# Altium PCB FP_A.PcbDoc (part 2 of 2)
Units mm, origin at the board's own origin, x right, y up, seen from the top; angles counter-clockwise.
Board outline 100 x 100 mm, 2 copper layers (Top Layer, Bottom Layer); 46 components, 104 nets, 431 pads, 841 vias.
Unrouted connection lines stored in the file: 843.
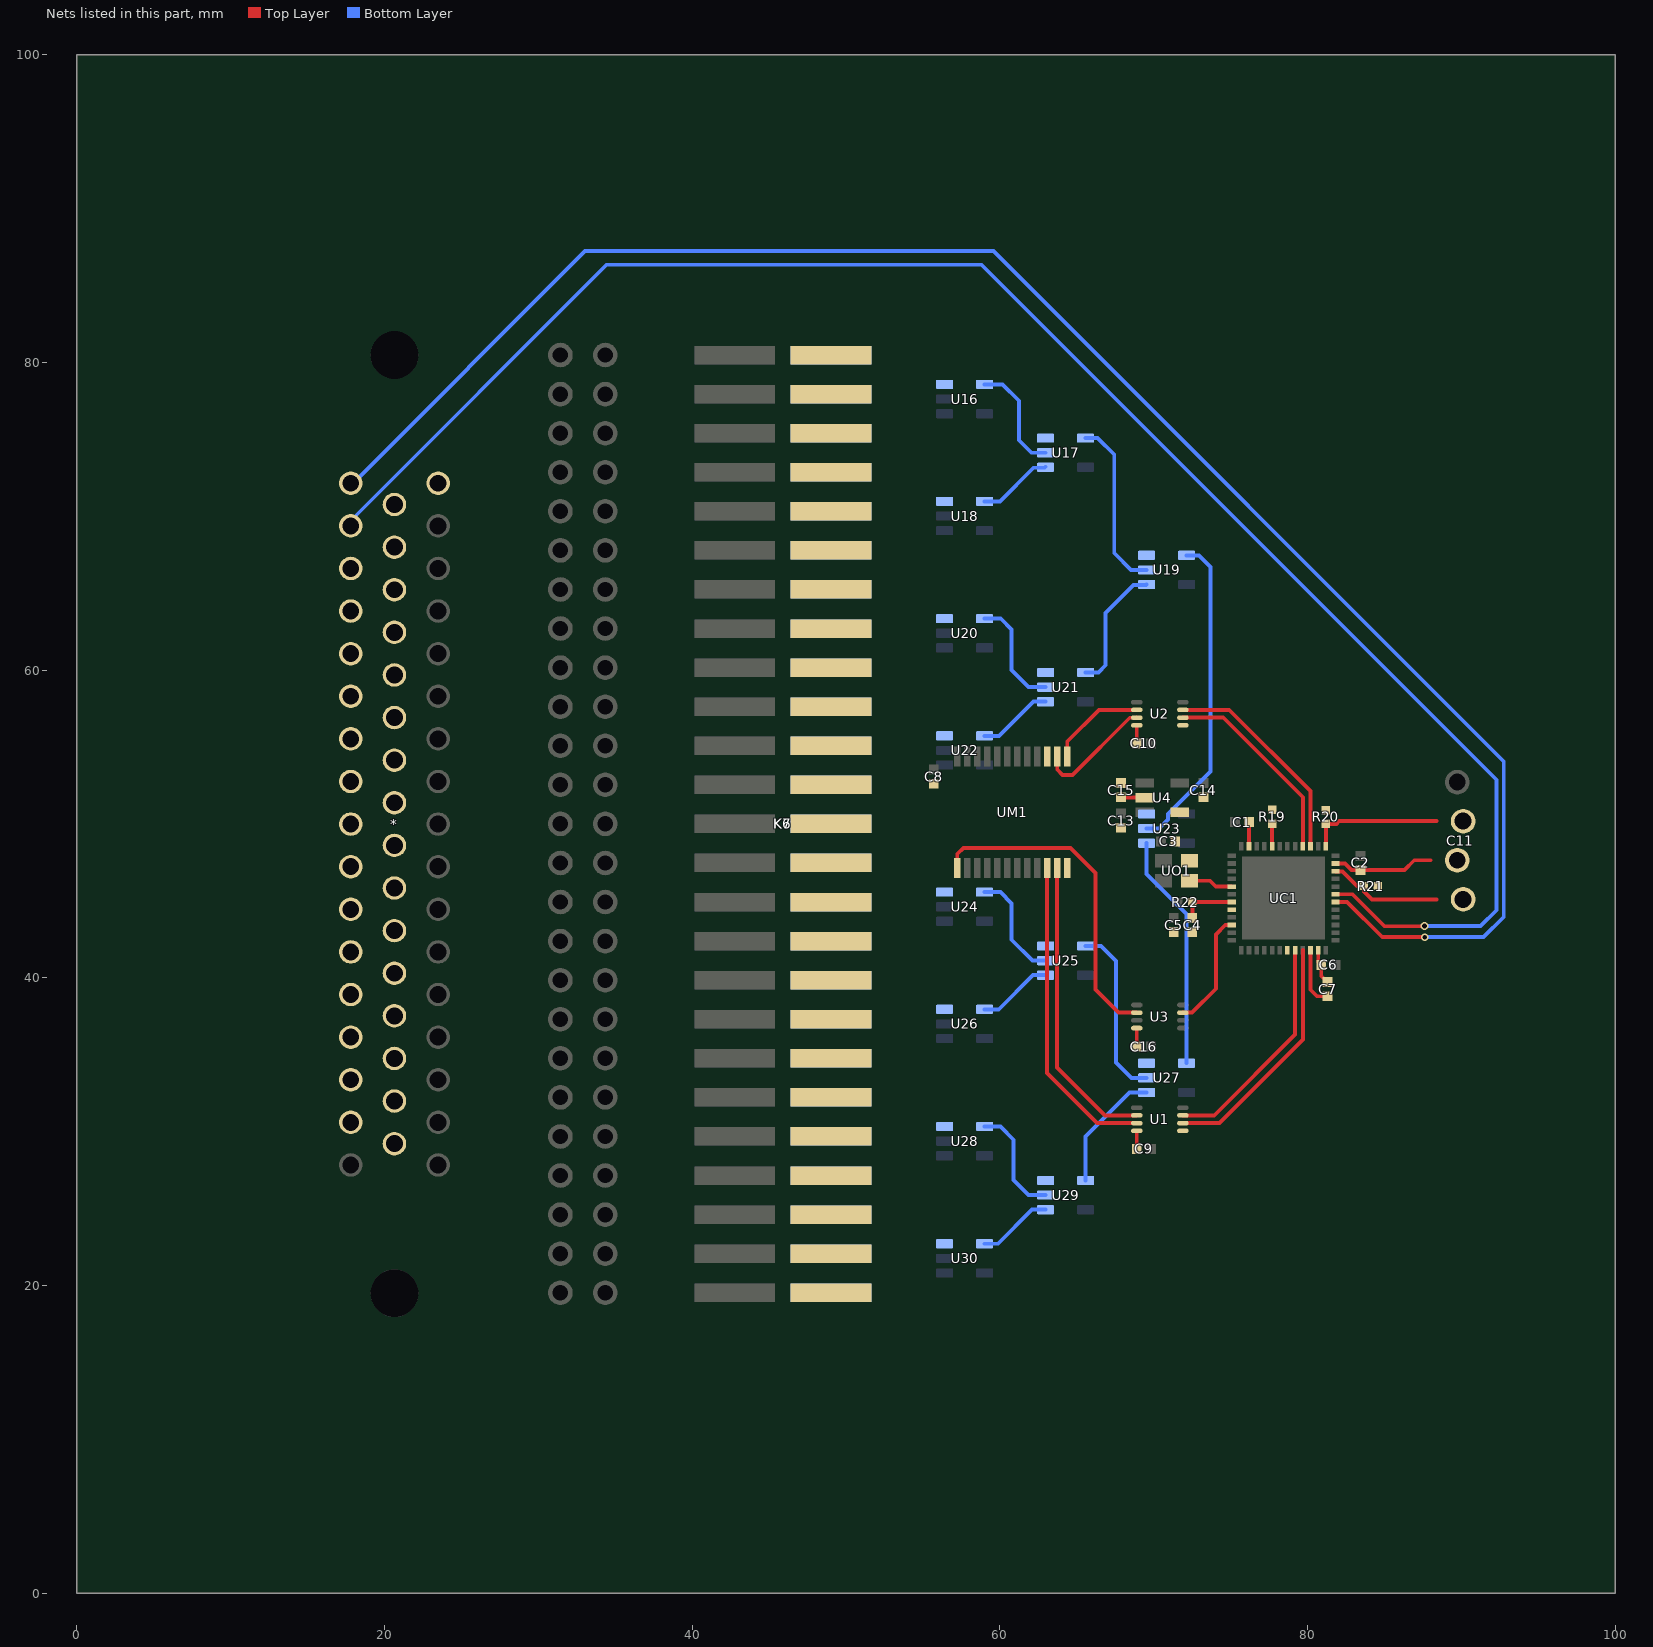
[diagram p2: the nets of this part, all layers, seen from the top]

## Via types
v1: diameter 0.45, hole 0.3, Top Layer to Bottom Layer, tented both sides, 823 vias
v2: diameter 0.5, hole 0.3, Top Layer to Bottom Layer, 18 vias

## Nets (pads, with @x,y where several pads share a name; then routed paths per layer and width w, separated by ;. In a path a pad name is that pad's centre, name@x,y a point inside that pad or via, vN(x,y) a via of type N, cw(c..) or ccw(c..) an arc to the next point about the centre after c; other vN are vias at no path point) (continued)
GND: *.1 *.18 *.19 *.20 *.21 *.22 *.23 *.24 *.25 *.26 *.27 *.28 *.29 *.30 *.31 *.32 *.33 *.36 *.37 *.38 *.39 *.40 *.41 *.42 *.43 *.44 *.45 *.46 *.47 *.48 *.49 C1.2 C2.1 C3.1 C4.1 C5.1 C6.2 C7.2 C8.2 C9.1 C10.1 C11.3 C13.2 C14.2 C15.2 C16.1 K6.2 K6.4 K6.6 K6.8 K6.10 K6.12 K6.14 K6.16 K6.18 K6.20 K6.22 K6.24 K6.26 K6.28 K6.30 K6.32 K6.34 K6.36 K6.38 K6.40 K6.42 K6.44 K6.46 K6.48 K6.50 K7.2 K7.4 K7.6 K7.8 K7.10 K7.12 K7.14 K7.16 K7.18 K7.20 K7.22 K7.24 K7.26 K7.28 K7.30 K7.32 K7.34 K7.36 K7.38 K7.40 K7.42 K7.44 K7.46 K7.48 K7.50 R19.2 R20.2 R21.2 U1.4 U1.5 U2.4 U2.5 U3.4 U4.4 U16.3 U17.3 U18.3 U19.3 U20.3 U21.3 U22.3 U23.3 U24.3 U25.3 U26.3 U27.3 U28.3 U29.3 U30.3 UC1.8 UC1.23 UC1.35 UC1.47 UM1.12 UM1.15 UO1.2 | length 14.2
  Top Layer w0.254: K7.26@49.022,50.013 K7.26@49.093,49.941 ; C9.1@68.904,28.884 U1.4@68.904,30.06 ; C16.1@68.904,35.535 U3.4@68.904,36.74 ; C10.1@68.904,55.241 U2.4@68.904,56.421 ; UC1.47@76.198,48.562 C1.2@76.198,50.133 ; UC1.23@80.698,41.812 80.698,41.041 C6.2@80.896,40.843 80.896,40.138 C7.2@81.305,39.728 ; UC1.35@81.823,47.437 82.434,47.437 82.858,47.013 C2.1@83.439,47.013 86.306,47.013 86.944,47.65 88.011,47.65
  other v1: -78.067,-159.574 -75.527,-159.574 -72.987,-159.574 -67.907,-159.574 -65.367,-159.574 -62.827,-159.574 -60.287,-159.574 -57.747,-159.574 -55.207,-159.574 -52.667,-159.574 -47.587,-159.574 -45.047,-159.574 -42.507,-159.574 -39.967,-159.574 -37.427,-159.574 -34.887,-159.574 -32.347,-159.574 -27.267,-159.574 -24.727,-159.574 -22.187,-159.574 -19.647,-159.574 -17.107,-159.574 -14.567,-159.574 -12.027,-159.574 -6.947,-159.574 -4.407,-159.574 -1.867,-159.574 -76.797,-157.034 -74.257,-157.034 -71.717,-157.034 -66.637,-157.034 -64.097,-157.034 -61.557,-157.034 -59.017,-157.034 -56.477,-157.034 -53.937,-157.034 -51.397,-157.034 -46.317,-157.034 -43.777,-157.034 -41.237,-157.034 -38.697,-157.034 -36.157,-157.034 -33.617,-157.034 -31.077,-157.034 -25.997,-157.034 -23.457,-157.034 -20.917,-157.034 -18.377,-157.034 -15.837,-157.034 -13.297,-157.034 -10.757,-157.034 -5.677,-157.034 -3.137,-157.034 -0.597,-157.034 -78.067,-154.494 -75.527,-154.494 -72.987,-154.494 -70.447,-154.494 -67.907,-154.494 -65.367,-154.494 -62.827,-154.494 -60.287,-154.494 -57.747,-154.494 -55.207,-154.494 -52.667,-154.494 -50.127,-154.494 -47.587,-154.494 -45.047,-154.494 -42.507,-154.494 -39.967,-154.494 -37.427,-154.494 -34.887,-154.494 -32.347,-154.494 -29.807,-154.494 -27.267,-154.494 -24.727,-154.494 -22.187,-154.494 -19.647,-154.494 -17.107,-154.494 -14.567,-154.494 -12.027,-154.494 -9.487,-154.494 -6.947,-154.494 -4.407,-154.494 -1.867,-154.494 -76.797,-151.954 -74.257,-151.954 -71.717,-151.954 -69.177,-151.954 -66.637,-151.954 -64.097,-151.954 -61.557,-151.954 -46.317,-151.954 -31.077,-151.954 -28.537,-151.954 -18.377,-151.954 -15.837,-151.954 -13.297,-151.954 -10.757,-151.954 -8.217,-151.954 -5.677,-151.954 -3.137,-151.954 -0.597,-151.954 -78.067,-149.414 -75.527,-149.414 -72.987,-149.414 -70.447,-149.414 -67.907,-149.414 -65.367,-149.414 -62.827,-149.414 -60.287,-149.414 -50.127,-149.414 -42.507,-149.414 -29.807,-149.414 -27.267,-149.414 -24.727,-149.414 -22.187,-149.414 -19.647,-149.414 -17.107,-149.414 -14.567,-149.414 -12.027,-149.414 -9.487,-149.414 -6.947,-149.414 -4.407,-149.414 -1.867,-149.414 -76.797,-146.874 -74.257,-146.874 -71.717,-146.874 -69.177,-146.874 -66.637,-146.874 -64.097,-146.874 -61.557,-146.874 -59.017,-146.874 -56.477,-146.874 -53.937,-146.874 -51.397,-146.874 -48.857,-146.874 -46.317,-146.874 -43.777,-146.874 -41.237,-146.874 -38.697,-146.874 -36.157,-146.874 -33.617,-146.874 -31.077,-146.874 -28.537,-146.874 -25.997,-146.874 -23.457,-146.874 -20.917,-146.874 -18.377,-146.874 -15.837,-146.874 -13.297,-146.874 -10.757,-146.874 -8.217,-146.874 -5.677,-146.874 -3.137,-146.874 -0.597,-146.874 -78.067,-144.334 -75.527,-144.334 -72.987,-144.334 -70.447,-144.334 -67.907,-144.334 -65.367,-144.334 -62.827,-144.334 -60.287,-144.334 -57.747,-144.334 -55.207,-144.334 -52.667,-144.334 -24.727,-144.334 -22.187,-144.334 -19.647,-144.334 -17.107,-144.334 -14.567,-144.334 -12.027,-144.334 -9.487,-144.334 -6.947,-144.334 -4.407,-144.334 -1.867,-144.334 -76.797,-141.794 -74.257,-141.794 -71.717,-141.794 -69.177,-141.794 -66.637,-141.794 -64.097,-141.794 -61.557,-141.794 -59.017,-141.794 -56.477,-141.794 -53.937,-141.794 -25.997,-141.794 -23.457,-141.794 -20.917,-141.794 -18.377,-141.794 -15.837,-141.794 -13.297,-141.794 -10.757,-141.794 -8.217,-141.794 -5.677,-141.794 -3.137,-141.794 -0.597,-141.794 -78.067,-139.254 -75.527,-139.254 -72.987,-139.254 -70.447,-139.254 -67.907,-139.254 -65.367,-139.254 -62.827,-139.254 -60.287,-139.254 -57.747,-139.254 -55.207,-139.254 -52.667,-139.254 -50.127,-139.254 -47.587,-139.254 -45.047,-139.254 -42.507,-139.254 -39.967,-139.254 -37.427,-139.254 -34.887,-139.254 -32.347,-139.254 -29.807,-139.254 -27.267,-139.254 -24.727,-139.254 -22.187,-139.254 -19.647,-139.254 -17.107,-139.254 -14.567,-139.254 -12.027,-139.254 -9.487,-139.254 -6.947,-139.254 -4.407,-139.254 -1.867,-139.254 -76.797,-136.714 -74.257,-136.714 -71.717,-136.714 -69.177,-136.714 -46.317,-136.714 -43.777,-136.714 -36.157,-136.714 -33.617,-136.714 -10.757,-136.714 -8.217,-136.714 -5.677,-136.714 -3.137,-136.714 -0.597,-136.714 -78.067,-134.174 -75.527,-134.174 -72.987,-134.174 -70.447,-134.174 -50.127,-134.174 -47.587,-134.174 -45.047,-134.174 -42.507,-134.174 -39.967,-134.174 -37.427,-134.174 -34.887,-134.174 -32.347,-134.174 -29.807,-134.174 -12.027,-134.174 -9.487,-134.174 -6.947,-134.174 -4.407,-134.174 -1.867,-134.174 -76.797,-131.634 -74.257,-131.634 -71.717,-131.634 -48.857,-131.634 -46.317,-131.634 -43.777,-131.634 -41.237,-131.634 -38.697,-131.634 -33.617,-131.634 -3.137,-131.634 -0.597,-131.634 -46.482,-129.221 -78.067,-129.094 -75.527,-129.094 -72.987,-129.094 -39.967,-129.094 -34.887,-129.094 -32.347,-129.094 -4.407,-129.094 -1.867,-129.094 -76.797,-126.554 -74.257,-126.554 -71.717,-126.554 -31.077,-126.554 -8.217,-126.554 -3.137,-126.554 -0.597,-126.554 -68.326,-126.427 -46.609,-126.173 -78.067,-124.014 -75.527,-124.014 -47.587,-124.014 -4.407,-124.014 -1.867,-124.014 -30.861,-123.125 -70.104,-121.855 -76.797,-121.474 -74.257,-121.474 -41.237,-121.474 -10.757,-121.474 -8.217,-121.474 -3.137,-121.474 -0.597,-121.474 -78.067,-118.934 -75.527,-118.934 -50.127,-118.934 -47.587,-118.934 -45.047,-118.934 -42.507,-118.934 -37.427,-118.934 -32.347,-118.934 -29.807,-118.934 -12.027,-118.934 -4.407,-118.934 -1.867,-118.934 -76.797,-116.394 -74.257,-116.394 -69.177,-116.394 -41.237,-116.394 -3.137,-116.394 -0.597,-116.394 -48.514,-115.505 -31.877,-115.378 -78.067,-113.854 -75.527,-113.854 -37.427,-113.854 -9.487,-113.854 -4.407,-113.854 -1.867,-113.854 -68.707,-112.076 -76.797,-111.314 -74.257,-111.314 -71.717,-111.314 -48.857,-111.314 -46.317,-111.314 -41.237,-111.314 -33.617,-111.314 -31.077,-111.314 -10.757,-111.314 -3.137,-111.314 -0.597,-111.314 -78.067,-108.774 -75.527,-108.774 -70.447,-108.774 -4.407,-108.774 -1.867,-108.774 -8.128,-108.647 -67.183,-106.615 -11.811,-106.615 -76.797,-106.234 -74.257,-106.234 -48.857,-106.234 -46.317,-106.234 -43.777,-106.234 -33.617,-106.234 -31.077,-106.234 -5.677,-106.234 -3.137,-106.234 -0.597,-106.234 -68.326,-104.456 -78.067,-103.694 -75.527,-103.694 -70.447,-103.694 -34.887,-103.694 -9.487,-103.694 -4.407,-103.694 -1.867,-103.694 -67.183,-101.535 -76.797,-101.154 -74.257,-101.154 -71.717,-101.154 -48.857,-101.154 -46.317,-101.154 -43.777,-101.154 -31.077,-101.154 -8.217,-101.154 -3.137,-101.154 -0.597,-101.154 -78.067,-98.614 -75.527,-98.614 -70.447,-98.614 -9.487,-98.614 -4.407,-98.614 -1.867,-98.614 -48.514,-97.725 -44.958,-97.725 -30.734,-97.598 -76.797,-96.074 -74.257,-96.074 -3.137,-96.074 -0.597,-96.074 -71.755,-94.169 -78.067,-93.534 -75.527,-93.534 -50.127,-93.534 -47.587,-93.534 -29.807,-93.534 -12.027,-93.534 -4.407,-93.534 -1.867,-93.534 -44.323,-92.137 -68.326,-91.375 -76.797,-90.994 -74.257,-90.994 -33.617,-90.994 -31.077,-90.994 -8.217,-90.994 -3.137,-90.994 -0.597,-90.994 -47.752,-90.105 -8.509,-88.835 -78.067,-88.454 -75.527,-88.454 -65.367,-88.454 -45.047,-88.454 -42.507,-88.454 -37.427,-88.454 -4.407,-88.454 -1.867,-88.454 -10.668,-86.803 -76.797,-85.914 -74.257,-85.914 -48.857,-85.914 -31.077,-85.914 -3.137,-85.914 -0.597,-85.914 -78.067,-83.374 -75.527,-83.374 -47.587,-83.374 -45.047,-83.374 -39.967,-83.374 -37.427,-83.374 -34.887,-83.374 -32.347,-83.374 -4.407,-83.374 -1.867,-83.374 -76.797,-80.834 -74.257,-80.834 -69.177,-80.834 -46.317,-80.834 -36.157,-80.834 -31.077,-80.834 -5.677,-80.834 -3.137,-80.834 -0.597,-80.834 -78.067,-78.294 -75.527,-78.294 -72.987,-78.294 -50.127,-78.294 -47.587,-78.294 -45.047,-78.294 -42.507,-78.294 -39.967,-78.294 -34.887,-78.294 -32.347,-78.294 -12.027,-78.294 -9.487,-78.294 -6.947,-78.294 -4.407,-78.294 -1.867,-78.294 -76.797,-75.754 -74.257,-75.754 -71.717,-75.754 -46.317,-75.754 -43.777,-75.754 -33.617,-75.754 -31.077,-75.754 -10.757,-75.754 -8.217,-75.754 -5.677,-75.754 -3.137,-75.754 -0.597,-75.754 -78.067,-73.214 -75.527,-73.214 -72.987,-73.214 -70.447,-73.214 -52.667,-73.214 -50.127,-73.214 -47.587,-73.214 -45.047,-73.214 -42.507,-73.214 -34.887,-73.214 -32.347,-73.214 -29.807,-73.214 -27.267,-73.214 -9.487,-73.214 -6.947,-73.214 -4.407,-73.214 -1.867,-73.214 -76.797,-70.674 -51.397,-70.674 -48.857,-70.674 -31.077,-70.674 -28.537,-70.674 -25.997,-70.674 -3.137,-70.674 -0.597,-70.674 -78.067,-68.134 -75.527,-68.134 -52.667,-68.134 -50.127,-68.134 -47.587,-68.134 -29.807,-68.134 -27.267,-68.134 -1.867,-68.134 -76.797,-65.594 -74.257,-65.594 -71.717,-65.594 -69.177,-65.594 -66.637,-65.594 -64.097,-65.594 -61.557,-65.594 -59.017,-65.594 -56.477,-65.594 -53.937,-65.594 -51.397,-65.594 -48.857,-65.594 -46.317,-65.594 -43.777,-65.594 -41.237,-65.594 -38.697,-65.594 -36.157,-65.594 -33.617,-65.594 -31.077,-65.594 -28.537,-65.594 -25.997,-65.594 -23.457,-65.594 -20.917,-65.594 -18.377,-65.594 -15.837,-65.594 -13.297,-65.594 -10.757,-65.594 -8.217,-65.594 -5.677,-65.594 -3.137,-65.594 -0.597,-65.594 -78.067,-63.054 -75.527,-63.054 -72.987,-63.054 -70.447,-63.054 -67.907,-63.054 -65.367,-63.054 -62.827,-63.054 -60.287,-63.054 -57.747,-63.054 -55.207,-63.054 -52.667,-63.054 -50.127,-63.054 -47.587,-63.054 -45.047,-63.054 -32.347,-63.054 -29.807,-63.054 -27.267,-63.054 -24.727,-63.054 -6.947,-63.054 -4.407,-63.054 -1.867,-63.054 -76.797,-60.514 -74.257,-60.514 -71.717,-60.514 -69.177,-60.514 -56.477,-60.514 -53.937,-60.514 -51.397,-60.514 -48.857,-60.514 -46.317,-60.514 -43.777,-60.514 -41.237,-60.514 -36.157,-60.514 -33.617,-60.514 -31.077,-60.514 -28.537,-60.514 -25.997,-60.514 -23.457,-60.514 -20.917,-60.514 -18.377,-60.514 -15.837,-60.514 -13.297,-60.514 -10.757,-60.514 -8.217,-60.514 -5.677,-60.514 -3.137,-60.514 -0.597,-60.514 -78.067,-57.974 -47.587,-57.974 -45.047,-57.974 -39.967,-57.974 -37.427,-57.974 -34.887,-57.974 -32.347,-57.974 -29.807,-57.974 -27.267,-57.974 -24.727,-57.974 -22.187,-57.974 -14.567,-57.974 -12.027,-57.974 -6.947,-57.974 -4.407,-57.974 -1.867,-57.974 -76.797,-55.434 -74.257,-55.434 -71.717,-55.434 -69.177,-55.434 -66.637,-55.434 -64.097,-55.434 -61.557,-55.434 -59.017,-55.434 -56.477,-55.434 -53.937,-55.434 -51.397,-55.434 -48.857,-55.434 -46.317,-55.434 -38.697,-55.434 -33.617,-55.434 -31.077,-55.434 -28.537,-55.434 -25.997,-55.434 -18.377,-55.434 -13.297,-55.434 -10.757,-55.434 -8.217,-55.434 -5.677,-55.434 -3.137,-55.434 -0.597,-55.434 -78.067,-52.894 -75.527,-52.894 -72.987,-52.894 -70.447,-52.894 -67.907,-52.894 -65.367,-52.894 -62.827,-52.894 -60.287,-52.894 -57.747,-52.894 -55.207,-52.894 -52.667,-52.894 -50.127,-52.894 -47.587,-52.894 -45.047,-52.894 -42.507,-52.894 -39.967,-52.894 -37.427,-52.894 -34.887,-52.894 -32.347,-52.894 -29.807,-52.894 -27.267,-52.894 -24.727,-52.894 -22.187,-52.894 -19.647,-52.894 -17.107,-52.894 -12.027,-52.894 -9.487,-52.894 -6.947,-52.894 -4.407,-52.894 -1.867,-52.894 -76.797,-50.354 -74.257,-50.354 -71.717,-50.354 -69.177,-50.354 -66.637,-50.354 -64.097,-50.354 -61.557,-50.354 -59.017,-50.354 -56.477,-50.354 -53.937,-50.354 -51.397,-50.354 -48.857,-50.354 -46.317,-50.354 -43.777,-50.354 -41.237,-50.354 -38.697,-50.354 -36.157,-50.354 -33.617,-50.354 -31.077,-50.354 -28.537,-50.354 -25.997,-50.354 -23.457,-50.354 -20.917,-50.354 -18.377,-50.354 -15.837,-50.354 -13.297,-50.354 -10.757,-50.354 -8.217,-50.354 -5.677,-50.354 -3.137,-50.354 -0.597,-50.354 -78.067,-47.814 -75.527,-47.814 -72.987,-47.814 -70.447,-47.814 -67.907,-47.814 -65.367,-47.814 -62.827,-47.814 -60.287,-47.814 -57.747,-47.814 -22.187,-47.814 -19.647,-47.814 -17.107,-47.814 -14.567,-47.814 -12.027,-47.814 -9.487,-47.814 -6.947,-47.814 -4.407,-47.814 -1.867,-47.814 -76.797,-45.274 -74.257,-45.274 -71.717,-45.274 -69.177,-45.274 -66.637,-45.274 -64.097,-45.274 -61.557,-45.274 -59.017,-45.274 -20.917,-45.274 -18.377,-45.274 -15.837,-45.274 -13.297,-45.274 -10.757,-45.274 -8.217,-45.274 -5.677,-45.274 -3.137,-45.274 -0.597,-45.274 -78.067,-42.734 -75.527,-42.734 -72.987,-42.734 -70.447,-42.734 -67.907,-42.734 -65.367,-42.734 -62.827,-42.734 -60.287,-42.734 -57.747,-42.734 -22.187,-42.734 -19.647,-42.734 -17.107,-42.734 -14.567,-42.734 -12.027,-42.734 -9.487,-42.734 -6.947,-42.734 -4.407,-42.734 -1.867,-42.734 -76.797,-40.194 -74.257,-40.194 -71.717,-40.194 -69.177,-40.194 -66.637,-40.194 -64.097,-40.194 -61.557,-40.194 -59.017,-40.194 -56.477,-40.194 -53.937,-40.194 -51.397,-40.194 -48.857,-40.194 -46.317,-40.194 -43.777,-40.194 -41.237,-40.194 -38.697,-40.194 -36.157,-40.194 -33.617,-40.194 -31.077,-40.194 -28.537,-40.194 -25.997,-40.194 -23.457,-40.194 -20.917,-40.194 -18.377,-40.194 -15.837,-40.194 -13.297,-40.194 -10.757,-40.194 -8.217,-40.194 -5.677,-40.194 -3.137,-40.194 -0.597,-40.194 -78.067,-37.654 -75.527,-37.654 -72.987,-37.654 -67.907,-37.654 -65.367,-37.654 -62.827,-37.654 -60.287,-37.654 -57.747,-37.654 -55.207,-37.654 -52.667,-37.654 -47.587,-37.654 -45.047,-37.654 -42.507,-37.654 -39.967,-37.654 -37.427,-37.654 -34.887,-37.654 -32.347,-37.654 -27.267,-37.654 -24.727,-37.654 -22.187,-37.654 -19.647,-37.654 -17.107,-37.654 -14.567,-37.654 -12.027,-37.654 -6.947,-37.654 -4.407,-37.654 -1.867,-37.654 -76.797,-35.114 -74.257,-35.114 -71.717,-35.114 -66.637,-35.114 -64.097,-35.114 -61.557,-35.114 -59.017,-35.114 -56.477,-35.114 -53.937,-35.114 -51.397,-35.114 -46.317,-35.114 -43.777,-35.114 -41.237,-35.114 -38.697,-35.114 -36.157,-35.114 -33.617,-35.114 -31.077,-35.114 -25.997,-35.114 -23.457,-35.114 -20.917,-35.114 -18.377,-35.114 -15.837,-35.114 -13.297,-35.114 -10.757,-35.114 -5.677,-35.114 -3.137,-35.114 -0.597,-35.114
NetC4_2: C4.2 R22.1 UC1.7 | length 3.6
  Top Layer w0.254: C4.2@72.514,43.894 R22.1@72.514,44.933 72.516,44.935 75.071,44.935 UC1.7@75.073,44.937
NetC7_1: C7.1 UC1.22 | length 3.9
  Top Layer w0.254: UC1.22@80.198,41.812 80.198,39.233 80.622,38.808 C7.1@81.305,38.808
NetC15_1: C15.1 U4.2 | length 1.5
  Top Layer w0.254: C15.1@67.884,51.744 67.899,51.729 69.393,51.729 U4.2@69.408,51.714
NetD1_1: 
NetD2_1: 
NetD3_1: 
NetD4_1: 
NetD5_1: 
NetD6_1: 
NetD7_1: 
NetD8_1: 
NetD9_1: 
NetD10_1: 
NetD11_1: 
NetD12_1: 
NetD13_1: 
NetD14_1: 
NetD15_1: 
NetD16_1: 
NetD17_1: 
NetD18_1: 
NetR19_1: R19.1 UC1.44 | length 1.5
  Top Layer w0.254: UC1.44@77.698,48.562 R19.1@77.698,50.02
NetU16_4: U16.4 U17.2 | length 7.3
  Bottom Layer w0.254: U16.4@59.008,78.583 60.178,78.583 61.239,77.521 61.239,74.955 62.052,74.143 U17.2@62.975,74.143
NetU17_1: U17.1 U18.4 | length 4.9
  Bottom Layer w0.254: U18.4@59.008,70.979 60.004,70.979 62.193,73.168 62.915,73.168 U17.1@62.975,73.228
NetU17_4: U17.4 U19.2 | length 11.3
  Bottom Layer w0.254: U17.4@65.575,75.093 66.36,75.093 67.437,74.016 67.437,67.615 68.529,66.523 U19.2@69.542,66.523
NetU19_1: U19.1 U21.4 | length 8.3
  Bottom Layer w0.254: U21.4@65.575,59.853 66.406,59.853 66.878,60.325 66.878,63.729 68.684,65.534 69.503,65.534 U19.1@69.542,65.573
NetU19_4: U19.4 U23.2 | length 21.1
  Bottom Layer w0.254: U23.2@69.542,49.708 70.348,49.708 70.93,50.289 70.93,50.655 73.685,53.411 73.685,66.726 72.938,67.473 U19.4@72.142,67.473
NetU20_4: U20.4 U21.2 | length 7.4
  Bottom Layer w0.254: U20.4@59.008,63.358 60.061,63.358 60.768,62.651 60.768,60.009 61.874,58.903 U21.2@62.975,58.903
NetU21_1: U21.1 U22.4 | length 4.9
  Bottom Layer w0.254: U22.4@59.008,55.738 59.954,55.738 62.193,57.976 62.963,57.976 U21.1@62.975,57.988
NetU23_1: U23.1 U27.4 | length 15.4
  Bottom Layer w0.254: U23.1@69.542,48.758 69.542,46.765 72.142,44.165 U27.4@72.142,34.453
NetU24_4: U24.4 U25.2 | length 7.2
  Bottom Layer w0.254: U24.4@59.008,45.578 60.035,45.578 60.768,44.845 60.768,42.483 62.128,41.123 U25.2@62.975,41.123
NetU25_1: U25.1 U26.4 | length 4.9
  Bottom Layer w0.254: U26.4@59.008,37.958 59.929,37.958 62.154,40.183 U25.1@62.975,40.183
NetU25_4: U25.4 U27.2 | length 11.4
  Bottom Layer w0.254: U25.4@65.575,42.073 66.589,42.073 67.564,41.097 67.564,34.493 68.554,33.503 U27.2@69.542,33.503
NetU27_1: U27.1 U29.4 | length 8
  Bottom Layer w0.254: U29.4@65.575,26.833 65.575,29.685 68.443,32.553 U27.1@69.542,32.553
NetU28_4: U28.4 U29.2 | length 7.3
  Bottom Layer w0.254: U28.4@59.008,30.338 60.035,30.338 60.893,29.48 60.893,26.864 61.874,25.883 62.825,25.883 U29.2@62.975,25.883
NetU29_1: U29.1 U30.4 | length 4.9
  Bottom Layer w0.254: U30.4@59.008,22.718 59.878,22.718 62.093,24.933 U29.1@62.975,24.933
NetUC1_5: UC1.5 UO1.3 | length 2.9
  Top Layer w0.254: UO1.3@72.329,46.315 73.661,46.315 74.039,45.937 UC1.5@75.073,45.937
S0_3.3V: U1.6 UC1.19 | length 15.9
  Top Layer w0.254: U1.6@71.902,30.56 74.274,30.56 79.698,35.985 79.698,41.812
S0_5V: U1.3 UM1.10 | length 20.5
  Top Layer w0.254: UM1.10@63.068,47.15 63.068,33.807 66.315,30.56 U1.3@68.904,30.56
S1_3.3V: U1.7 UC1.20 | length 15
  Top Layer w0.254: U1.7@71.902,31.064 73.939,31.064 79.197,36.322 UC1.20@79.198,41.812
S1_5V: U1.2 UM1.11 | length 19.4
  Top Layer w0.254: UM1.11@63.729,47.15 63.729,34.163 66.831,31.06 U1.2@68.904,31.06
S2_3.3V: U2.6 UC1.40 | length 13.1
  Top Layer w0.254: U2.6@71.902,56.921 74.524,56.921 79.698,51.747 UC1.40@79.698,48.562
S2_5V: U2.3 UM1.14 | length 7.7
  Top Layer w0.254: UM1.14@63.734,54.4 63.734,53.538 64.084,53.188 64.719,53.188 68.444,56.912 68.895,56.912 U2.3@68.904,56.921
S3_3.3V: U2.7 UC1.39 | length 14.1
  Top Layer w0.254: U2.7@71.902,57.421 74.913,57.421 80.188,52.146 80.188,48.572 UC1.39@80.198,48.562
S3_5V: U2.2 UM1.13 | length 6.3
  Top Layer w0.254: UM1.13@64.384,54.4 64.384,55.367 66.438,57.421 U2.2@68.904,57.421
SWCLK: C11.2 R20.1 UC1.37 | length 8.7
  Top Layer w0.254: UC1.37@81.198,48.562 R20.1@81.198,50.013 81.89,50.013 82.067,50.19 88.392,50.19
SWDIO: C11.4 R21.1 UC1.34 | length 7.5
  Top Layer w0.254: UC1.34@81.823,46.937 81.846,46.914 82.268,46.914 83.207,45.974 R21.1@83.668,45.974 83.668,45.618 84.201,45.085 88.392,45.085
TIM2_CH1: U3.7 UC1.10 | length 7.5
  Top Layer w0.254: U3.7@71.902,37.74 72.488,37.74 74.041,39.294 74.041,42.815 74.656,43.429 UC1.10@74.988,43.429
TIM2_CH1_5V: U3.2 UM1.1 | length 21.6
  Top Layer w0.254: UM1.1@57.234,47.15 57.234,48.043 57.629,48.438 64.592,48.438 66.218,46.812 66.218,39.243 67.72,37.74 U3.2@68.904,37.74
UART_RX: *.35 UC1.31 | length 115.8
  Top Layer w0.254: UC1.31@81.823,45.437 82.935,45.437 85.014,43.358 87.593,43.358 v2(87.612,43.376)
  Bottom Layer w0.254: *.35@17.805,69.39 17.805,69.723 34.442,86.36 58.801,86.36 92.278,52.883 92.278,44.399 91.255,43.376 v2(87.612,43.376)
UART_TX: *.34 UC1.30 | length 117.4
  Top Layer w0.254: UC1.30@81.823,44.937 82.571,44.937 84.861,42.647 v2(87.63,42.647)
  Bottom Layer w0.254: *.34@17.876,72.088 33.037,87.249 59.588,87.249 92.761,54.077 92.761,43.967 91.44,42.647 v2(87.63,42.647)
pads on no net: *. U3.3 U3.6 UC1.2 UC1.3 UC1.4 UC1.6 UC1.11 UC1.12 UC1.13 UC1.14 UC1.15 UC1.16 UC1.17 UC1.18 UC1.21 UC1.25 UC1.26 UC1.27 UC1.28 UC1.29 UC1.32 UC1.33 UC1.38 UC1.41 UC1.42 UC1.43 UC1.45 UC1.46 UC1.49
copper on no net: | length 1543.4
  Top Layer w0.508: -64.643,-134.53 -62.818,-134.53 ; -64.643,-126.91 -62.818,-126.91 ; -64.643,-119.29 -62.818,-119.29 ; -64.643,-111.67 -62.818,-111.67 ; -64.643,-106.59 -62.818,-106.59 ; -64.643,-101.51 -62.818,-101.51 ; -64.643,-93.89 -62.818,-93.89 ; -64.643,-86.27 -62.818,-86.27 ; -64.643,-78.65 -62.818,-78.65 ; -61.468,-134.53 -51.497,-134.53 ; -61.468,-126.91 -51.497,-126.91 ; -61.468,-119.29 -51.497,-119.29 ; -61.468,-111.67 -51.497,-111.67 ; -61.468,-106.59 -51.497,-106.59 ; -61.468,-101.51 -51.497,-101.51 ; -61.468,-93.89 -51.497,-93.89 ; -61.468,-86.27 -51.497,-86.27 ; -61.468,-78.65 -51.497,-78.65 ; -27.497,-134.53 -17.526,-134.53 ; -27.497,-126.91 -17.526,-126.91 ; -27.497,-119.29 -17.526,-119.29 ; -27.497,-111.67 -17.526,-111.67 ; -27.497,-106.59 -17.526,-106.59 ; -27.497,-101.51 -17.526,-101.51 ; -27.497,-93.89 -17.526,-93.89 ; -27.497,-86.27 -17.526,-86.27 ; -27.497,-78.65 -17.526,-78.65 ; -16.176,-134.53 -14.351,-134.53 ; -16.176,-126.91 -14.351,-126.91 ; -16.176,-119.29 -14.351,-119.29 ; -16.176,-111.67 -14.351,-111.67 ; -16.176,-106.59 -14.351,-106.59 ; -16.176,-101.51 -14.351,-101.51 ; -16.176,-93.89 -14.351,-93.89 ; -16.176,-86.27 -14.351,-86.27 ; -16.176,-78.65 -14.351,-78.65
  Bottom Layer w0.381: -65.888,-105.32 -46.203,-105.32 -46.101,-105.218 ; -31.344,-108.012 -31.217,-107.886 -13.236,-107.886
  Bottom Layer w0.508: -72.048,-124.942 -73.025,-123.964 -73.025,-109.13 -71.435,-107.54 -70.497,-107.54 ; -72.009,-124.903 -71.592,-125.32 -70.497,-125.32 -71.669,-125.32 ; -70.497,-132.94 -70.491,-132.935 -69.626,-132.935 -69.215,-132.523 -69.215,-129.602 -66.294,-126.681 -66.294,-124.903 -66.827,-124.37 -67.897,-124.37 ; -70.497,-131.04 -70.497,-128.09 -69.215,-126.808 -69.215,-123.76 -69.555,-123.42 -70.497,-123.42 -71.287,-123.42 -71.628,-123.08 -71.628,-116.144 -71.272,-115.788 -70.485,-115.788 -70.485,-111.949 -67.897,-109.361 -67.897,-107.54 ; -70.497,-117.7 -70.497,-119.557 -67.897,-122.157 -67.897,-123.42 ; -70.497,-106.59 -71.537,-106.59 -73.025,-105.102 -73.025,-91.193 -71.592,-89.76 -70.497,-89.76 ; -70.497,-97.38 -70.491,-97.375 -69.626,-97.375 -68.961,-96.709 -68.961,-94.042 -66.167,-91.248 -66.167,-89.343 -66.7,-88.81 -67.897,-88.81 ; -70.497,-82.14 -70.497,-83.997 -67.897,-86.597 -67.897,-87.86 ; -67.897,-131.99 -66.573,-131.99 -66.04,-132.523 -66.04,-134.657 -64.897,-135.8 -58.667,-135.8 -57.397,-134.53 -55.372,-134.53 -51.497,-134.53 ; -67.897,-131.04 -66.716,-131.04 -66.04,-130.364 -66.04,-128.942 -65.278,-128.18 -58.667,-128.18 -57.397,-126.91 -55.372,-126.91 -51.497,-126.91 ; -67.897,-116.75 -66.7,-116.75 -66.04,-117.41 -66.04,-119.417 -64.897,-120.56 -58.667,-120.56 -57.397,-119.29 -55.372,-119.29 -51.497,-119.29 ; -67.897,-115.8 -66.716,-115.8 -66.04,-115.124 -66.04,-113.702 -65.278,-112.94 -58.667,-112.94 -57.397,-111.67 -55.372,-111.67 -51.497,-111.67 ; -67.897,-105.64 -66.208,-105.64 -65.888,-105.32 ; -67.897,-96.43 -66.827,-96.43 -66.294,-96.963 -66.294,-98.995 -65.049,-100.24 -58.667,-100.24 -57.397,-101.51 -55.372,-101.51 -51.497,-101.51 ; -67.897,-95.48 -66.716,-95.48 -66.294,-95.058 -66.294,-94.398 -64.516,-92.62 -58.667,-92.62 -57.397,-93.89 -55.372,-93.89 -51.497,-93.89 ; -67.897,-81.19 -66.592,-81.19 -66.294,-81.488 -66.294,-83.628 -64.922,-85 -58.667,-85 -57.397,-86.27 -55.372,-86.27 -51.497,-86.27 ; -67.897,-80.24 -66.592,-80.24 -66.294,-79.943 -66.294,-79.158 -64.516,-77.38 -58.667,-77.38 -57.397,-78.65 -55.372,-78.65 -51.497,-78.65 ; -56.372,-131.99 -51.117,-131.99 -42.337,-123.21 ; -56.372,-129.45 -51.347,-129.45 -42.337,-120.44 ; -56.372,-124.37 -49.037,-124.37 -42.337,-117.67 ; -56.372,-121.83 -49.267,-121.83 -42.337,-114.9 ; -56.372,-116.75 -46.957,-116.75 -42.337,-112.13 ; -56.372,-114.21 -47.187,-114.21 -42.337,-109.36 ; -56.372,-109.13 -44.877,-109.13 -42.337,-106.59 ; -56.372,-104.05 -44.069,-104.05 -43.815,-103.796 -42.361,-103.796 -42.337,-103.82 ; -56.372,-98.97 -44.417,-98.97 -42.337,-101.05 ; -56.372,-96.43 -44.187,-96.43 -42.337,-98.28 ; -56.372,-91.35 -46.497,-91.35 -42.337,-95.51 ; -56.372,-88.81 -46.267,-88.81 -42.337,-92.74 ; -56.372,-83.73 -48.577,-83.73 -42.337,-89.97 ; -56.372,-81.19 -48.347,-81.19 -42.337,-87.2 ; -56.372,-76.11 -51.497,-76.11 -48.539,-76.11 -42.337,-82.312 -42.337,-84.43 ; -55.372,-137.07 -51.497,-137.07 -49.378,-137.07 -45.11,-132.802 -45.11,-128.753 -42.337,-125.98 ; -51.497,-106.59 -55.372,-106.59 -57.397,-106.59 -58.667,-107.86 -65.684,-107.86 -66.004,-107.54 -67.897,-107.54 ; -46.101,-105.218 -41.656,-105.218 -40.767,-104.329 -40.767,-78.929 -42.291,-77.405 -42.291,-74.865 -39.497,-72.071 -39.497,-70.69 ; -40.447,-68.09 -40.447,-65.147 -39.497,-64.197 -39.497,-59.59 ; -38.593,-68.136 -38.547,-68.09 -38.547,-69.061 -38.891,-69.404 -63.373,-69.404 -70.485,-76.516 -70.485,-80.228 -70.497,-80.24 -71.796,-80.24 -72.644,-81.088 -72.644,-87.057 -71.841,-87.86 -70.497,-87.86 -69.555,-87.86 -69.215,-88.2 -69.215,-90.994 -70.497,-92.276 -70.497,-95.48 -71.457,-95.48 -71.755,-95.778 -71.755,-98.487 -69.215,-101.027 -69.215,-106.472 -68.147,-107.54 -67.897,-107.54 ; -38.547,-70.69 -38.547,-73.021 -36.703,-74.865 -36.703,-77.405 -38.227,-78.929 -38.227,-107.123 -37.338,-108.012 -31.344,-108.012 ; -36.657,-128.75 -36.657,-131.172 -30.759,-137.07 -27.497,-137.07 -22.622,-137.07 ; -36.657,-125.98 -30.647,-131.99 -22.622,-131.99 ; -36.657,-123.21 -30.417,-129.45 -22.622,-129.45 ; -36.657,-120.44 -32.727,-124.37 -22.622,-124.37 ; -36.657,-117.67 -32.497,-121.83 -22.622,-121.83 ; -36.657,-114.9 -34.807,-116.75 -22.622,-116.75 ; -36.657,-112.13 -34.577,-114.21 -22.622,-114.21 ; -36.657,-106.59 -34.117,-104.05 -22.622,-104.05 ; -36.657,-103.82 -31.807,-98.97 -22.622,-98.97 ; -36.657,-101.05 -32.037,-96.43 -22.622,-96.43 ; -36.657,-98.28 -29.727,-91.35 -22.622,-91.35 ; -36.657,-95.51 -29.957,-88.81 -22.622,-88.81 ; -36.657,-92.74 -27.647,-83.73 -22.622,-83.73 ; -36.657,-89.97 -27.877,-81.19 -22.622,-81.19 ; -36.657,-87.2 -33.884,-84.428 -33.884,-81.445 -28.62,-76.18 -27.567,-76.18 -27.497,-76.11 -23.622,-76.11 ; -36.463,-109.166 -36.657,-109.36 -36.463,-109.36 -31.066,-109.36 -30.836,-109.13 -27.497,-109.13 ; -27.497,-134.53 -23.622,-134.53 -21.597,-134.53 -20.327,-135.8 -14.097,-135.8 -13.208,-134.911 -13.208,-133.895 -12.253,-132.94 -11.097,-132.94 ; -27.497,-126.91 -23.622,-126.91 -21.597,-126.91 -20.327,-128.18 -13.716,-128.18 -12.954,-128.942 -12.954,-131.355 -12.319,-131.99 -11.097,-131.99 ; -27.497,-119.29 -23.622,-119.29 -21.597,-119.29 -20.327,-120.56 -14.097,-120.56 -13.208,-119.671 -13.208,-118.655 -12.253,-117.7 -11.097,-117.7 ; -27.497,-111.67 -23.622,-111.67 -21.597,-111.67 -20.327,-112.94 -13.716,-112.94 -12.954,-113.702 -12.954,-116.115 -12.319,-116.75 -11.097,-116.75 ; -27.497,-106.59 -23.622,-106.59 -21.597,-106.59 -20.327,-105.32 -13.667,-105.32 -13.347,-105.64 -11.097,-105.64 ; -27.497,-101.51 -23.622,-101.51 -21.597,-101.51 -20.327,-100.24 -12.7,-100.24 -11.097,-98.637 -11.097,-97.38 ; -27.497,-93.89 -23.622,-93.89 -21.597,-93.89 -20.327,-92.62 -14.478,-92.62 -13.208,-93.89 -13.208,-95.795 -12.573,-96.43 -11.097,-96.43 ; -27.497,-86.27 -23.622,-86.27 -21.597,-86.27 -20.327,-85 -12.7,-85 -11.097,-83.397 -11.097,-82.14 ; -27.497,-78.65 -23.622,-78.65 -21.597,-78.65 -20.327,-77.38 -14.478,-77.38 -13.208,-78.65 -13.208,-80.555 -12.573,-81.19 -11.097,-81.19 ; -27.476,-109.339 -27.267,-109.13 -23.622,-109.13 -22.622,-109.13 ; -22.766,-76.255 -22.622,-76.11 ; -13.236,-107.886 -12.89,-107.54 -11.097,-107.54 ; -11.097,-125.32 -11.097,-126.862 -8.497,-129.462 -8.497,-131.04 ; -11.097,-124.37 -11.115,-124.353 -11.956,-124.353 -12.7,-123.608 -12.7,-122.084 -9.779,-119.163 -9.779,-116.832 -8.747,-115.8 -8.497,-115.8 ; -11.097,-89.76 -11.097,-91.302 -8.497,-93.902 -8.497,-95.48 ; -11.097,-88.81 -12.192,-88.81 -12.573,-88.429 -12.573,-86.778 -9.779,-83.984 -9.779,-81.272 -8.747,-80.24 -8.497,-80.24 ; -8.497,-132.94 -7.148,-132.94 -6.35,-132.142 -6.35,-126.173 -7.203,-125.32 -8.497,-125.32 -9.464,-125.32 -9.779,-125.005 -9.779,-121.322 -8.497,-120.04 -8.497,-117.7 -7.554,-117.7 -7.239,-117.385 -7.239,-111.67 -9.906,-109.003 -9.906,-105.938 -10.204,-105.64 -11.097,-105.64 ; -8.497,-123.42 -7.432,-123.42 -6.35,-122.338 -6.35,-107.606 -7.366,-106.59 -8.497,-106.59 ; -8.497,-105.64 -7.559,-105.64 -6.35,-104.431 -6.35,-88.835 -7.325,-87.86 -8.497,-87.86 ; -8.497,-97.38 -8.463,-97.38 ; -8.497,-82.14 -8.497,-85.242 -9.779,-86.524 -9.779,-89.318 -9.337,-89.76 -8.497,-89.76 -8.479,-89.778 -7.638,-89.778 -7.239,-90.177 -7.239,-97.083 -7.537,-97.38 -8.463,-97.38 ; -11.097,-105.64 -11.097,-101.558 -8.509,-98.97 -8.509,-97.426 -8.463,-97.38

## Polygon pours and split planes (outlines as drawn)
3.3V on Top Layer "Top Layer-3.3V" (solid, pour order 89): 83.515,28.6 83.541,28.575 83.541,40.361 92.177,40.361 92.177,52.603 86.512,58.268 70.942,58.268 70.942,52.222 74.168,52.222 74.748,51.642 74.748,50.19 70.688,50.19 70.002,49.505 70.002,38.049 72.339,38.049 72.339,41.514 74.564,43.739 75.426,43.739 75.426,44.12 74.676,44.12 72.339,41.783 70.561,41.783 70.561,43.459 71.958,43.459 71.958,45.415 71.323,45.415 71.323,48.006 70.917,48.412 70.917,49.129 70.917,49.53 74.748,49.53 74.748,49.223 75.387,48.584 75.387,48.133 74.748,48.133 74.748,47.742 75.565,47.742 75.565,48.006 75.667,48.108 75.895,48.108 75.895,49.045 75.717,49.223 75.717,51.994 74.6,53.111 71.298,53.111 71.298,57.734 82.55,57.734 88.798,51.486 91.643,51.486 91.643,49.2 84.912,49.2 84.049,48.336 81.483,48.336 81.483,47.752 82.855,47.752 83.083,47.523 84.049,47.523 85.319,48.793 91.669,48.793 91.669,41.046 83.541,41.046 83.541,41.402 81.61,41.402 81.61,41.885 81.305,42.189 81.025,42.189 81.025,41.402 81.382,41.402 81.382,40.361 82.728,40.361 82.728,29.083 70.968,29.083 70.968,30.81 71.526,31.369 72.517,31.369 72.517,31.826 70.917,31.826 70.612,31.521 70.612,28.6 79.781,28.6
5V_C2 on Top Layer "Top Layer-5V_C2" (solid, pour order 57): 55.395,53.19 ccw(c55.489,53.297) 55.489,53.155 56.003,53.155 ccw(c56.003,53.166) 56.004,53.155 56.566,53.155 cw(c56.566,52.8) 56.921,52.8 56.921,51.41 ccw(c58.064,51.41) 58.064,50.267 68.605,50.267 cw(c68.605,49.881) 68.991,49.881 68.991,38.589 cw(c68.832,38.589) 68.832,38.43 68.665,38.43 ccw(c68.665,38.238) 68.473,38.238 ccw(c68.662,38.238) 68.662,38.049 69.177,38.049 cw(c69.177,37.783) 69.444,37.783 69.444,35.281 ccw(c69.621,35.281) 69.621,35.103 69.825,35.103 cw(c69.825,34.9) 70.028,34.9 70.028,32.283 cw(c69.545,32.283) 69.545,31.801 68.699,31.801 ccw(c68.699,31.574) 68.473,31.574 ccw(c68.696,31.574) 68.696,31.351 69.411,31.351 cw(c69.411,30.734) 70.028,30.734 70.028,29.515 cw(c69.825,29.515) 69.825,29.312 69.621,29.312 ccw(c69.621,29.083) 69.393,29.083 69.393,28.639 ccw(c69.558,28.639) 69.558,28.473 70.043,28.473 ccw(c70.044,28.686) 70.256,28.686 70.256,35.763 71.018,36.525 72.179,36.525 ccw(c72.179,36.725) 72.379,36.725 ccw(c72.175,36.725) 72.175,36.929 70.919,36.929 69.418,38.43 69.418,49.86 cw(c69.825,49.86) 69.825,50.267 69.952,50.267 ccw(c69.952,50.902) 70.587,50.902 70.587,52.426 ccw(c70.447,52.426) 70.447,52.565 cw(c70.447,52.77) 70.242,52.77 70.242,57.031 ccw(c69.158,57.031) 69.158,58.115 68.698,58.115 ccw(c68.698,57.921) 68.504,57.921 ccw(c68.699,57.921) 68.699,57.726 69.088,57.726 cw(c69.088,57.343) 69.471,57.343 69.471,53.254 cw(c69.277,53.254) 69.277,53.061 68.885,53.061 ccw(c68.885,52.807) 68.631,52.807 68.631,52.568 ccw(c68.874,52.568) 68.875,52.324 70.014,52.324 cw(c70.014,52.096) 70.242,52.096 70.242,51.472 cw(c69.952,51.472) 69.952,51.181 67.666,51.181 58.197,51.181 cw(c58.197,51.873) 57.505,51.873 57.505,53.611 57.505,54.929 ccw(c57.505,54.929) 57.505,54.929 ccw(c57.229,54.929) 57.229,55.205 ccw(c57.3,54.806) 56.895,54.806 56.895,54.047 cw(c56.764,54.047) 56.764,53.916 55.462,53.916 ccw(c55.462,53.8) 55.346,53.8 55.346,53.67 53.137,51.46 45.999,51.46 45.009,50.47 45.39,50.089 45.39,50.478 46.118,51.206 53.257,51.206 55.236,53.185 cw(c55.318,53.103)
no net on Top Layer "NONET_L-01_P-001" (solid, pour order 65): 72.034,49.682 72.022,49.695
GND on Top Layer "NONET_L-01_P-001" (solid, shelved, pour order 24): 10.719,95.961 90.322,95.961 cw(c90.322,90.322) 95.961,90.322 95.961,8.839 cw(c91.186,8.839) 91.186,4.064 8.738,4.064 cw(c8.738,8.738) 4.064,8.738 4.064,89.306 cw(c10.719,89.306)
GND on Bottom Layer "NONET_L-01_P-001" (solid, shelved, pour order 14): 8.636,87.605 93.751,87.605 93.751,11.481 8.636,11.481

## Silkscreen, mask and mechanical layers (free items; w line width, h text height)
Top Overlay:
  drawing of 15 lines, arcs and shapes, not listed
  text "3.3V" at 93.088,52.245 h0.76
  text "SWCLK" at 93.393,49.705 h0.76
  text "GND" at 93.215,47.19 h0.76
  text "SWDIO" at 93.545,44.701 h0.76
  text "FrontPlane v1.0 / MLBX to TTypeFBTxs" at -56.007,-48.085 h3
  text "A. Peralta - C. Rojas - R. Carmona / F1210757" at -77.807,-61.708 h2
  text "Error" at -46.997,-71.09 h4
  text "Converter 1" at -75.087,-72.43 h4
  text "Converter 2" at -25.497,-72.43 h4
  text "MLBX / TType" at -67.997,-74.845 h1.52
  text "MLBX / TType" at -25.497,-74.845 h1.52
  text "DIO1_ch1 / T_K3_L" at -67.997,-77.377 h1.52
  text "DIO1_ch17 / T_K1_L" at -25.497,-77.377 h1.52
  text "E_K3_L" at -59.628,-79.917 h1.52
  text "E_K1_L" at -25.497,-79.917 h1.52
  text "DIO1_ch2 / P_K3_L" at -67.997,-82.457 h1.52
  text "DIO1_ch18 / P_K1_L" at -25.497,-82.457 h1.52
  text "DIO1_ch3 / P_K4_H" at -67.997,-84.997 h1.52
  text "DIO1_ch19 / P_K2_H" at -25.497,-84.997 h1.52
  text "E_K4_H" at -59.715,-87.537 h1.52
  text "E_K2_H" at -25.497,-87.537 h1.52
  text "GND" at -71.02,-89.266 h3 r90
  text "GND" at -4.98,-89.266 h3 r90
  text "DIO1_ch4 / T_K4_H" at -67.997,-90.077 h1.52
  text "DIO1_ch20 / T_K2_H" at -25.497,-90.077 h1.52
  text "DIO1_ch5 / T_K6_H" at -67.997,-92.617 h1.52
  text "DIO1_ch21 / T_K5_H" at -25.497,-92.617 h1.52
  text "E_K6_H" at -59.715,-95.157 h1.52
  text "E_K5_H" at -25.497,-95.157 h1.52
  text "DIO1_ch6 / P_K6_H" at -67.997,-97.697 h1.52
  text "DIO1_ch22 / P_K5_H" at -25.497,-97.697 h1.52
  text "DIO1_ch7 / T_K6_L" at -67.997,-100.237 h1.52
  text "DIO1_ch23 / T_K5_L" at -25.497,-100.237 h1.52
  text "E_K6_L" at -59.628,-102.777 h1.52
  text "E_K5_L" at -25.497,-102.777 h1.52
  text "DIO1_ch8 / P_K6_L" at -67.997,-105.317 h1.52
  text "DIO1_ch24 / P_K5_L" at -25.497,-105.317 h1.52
  text "5VDC" at -59.497,-107.857 h1.52
  text "5VDC" at -25.497,-107.857 h1.52
  text "DIO1_ch9 / P_K5_L" at -67.997,-110.397 h1.52
  text "DIO1_ch25 / P_K6_L" at -25.497,-110.397 h1.52
  text "E_K5_L" at -59.628,-112.937 h1.52
  text "E_K6_L" at -25.497,-112.937 h1.52
  text "DIO1_ch10 / T_K5_L" at -67.997,-115.477 h1.52
  text "DIO1_ch26 / T_K6_L" at -25.497,-115.477 h1.52
  text "DIO1_ch11 / P_K5_H" at -67.997,-118.017 h1.52
  text "DIO1_ch27 / P_K6_H" at -25.497,-118.017 h1.52
  text "E_K5_H" at -59.715,-120.557 h1.52
  text "E_K6_H" at -25.497,-120.557 h1.52
  text "DIO1_ch12 / T_K5_H" at -67.997,-123.097 h1.52
  text "DIO1_ch28 / T_K6_H" at -25.497,-123.097 h1.52
  text "DIO1_ch13 / T_K2_H" at -67.997,-125.637 h1.52
  text "DIO1_ch29 / T_K4_H" at -25.497,-125.637 h1.52
  text "E_K2_H" at -59.715,-128.177 h1.52
  text "E_K4_H" at -25.497,-128.177 h1.52
  text "GND" at -71.02,-130.618 h3 r90
  text "GND" at -4.98,-130.618 h3 r90
  text "DIO1_ch14 / P_K2_H" at -67.997,-130.717 h1.52
  text "DIO1_ch30 / P_K4_H" at -25.497,-130.717 h1.52
  text "DIO1_ch15 / P_K1_L" at -67.997,-133.257 h1.52
  text "DIO1_ch31 / P_K3_L" at -25.497,-133.257 h1.52
  text "E_K1_L" at -59.628,-135.797 h1.52
  text "E_K3_L" at -25.497,-135.797 h1.52
  text "DIO1_ch16 / T_K1_L" at -67.997,-138.337 h1.52
  text "DIO1_ch32 / T_K3_L" at -25.497,-138.337 h1.52
  text "PortA MLBX" at -51.997,-146.09 h4
Bottom Overlay:
  text "FrontPlane v1.0 / MLBX to TTypeFBTxs" at -22.987,-48.085 h3
  text "GND" at -62.82,-70.141 h3 r270
  text "Signal" at -57.698,-70.141 h3 r270
  text "Signal" at -24.82,-70.141 h3 r270
  text "GND" at -19.698,-70.141 h3 r270
  text "GND" at -62.82,-151.819 h3 r270
  text "Signal" at -57.698,-151.819 h3 r270
  text "Signal" at -24.82,-151.819 h3 r270
  text "GND" at -19.698,-151.819 h3 r270
Board:
  lines w0.254: -79.497,-161.34 0.503,-161.34 0.503,-32.84 -79.497,-32.84 -79.497,-161.34 ; 0,0 100,0 100,100 0,100 0,0